# Altium PCB LED_EN_Kian_V2_t1.PcbDoc
Units mm, origin at the board's own origin, x right, y up, seen from the top; angles counter-clockwise.
Board outline 63.5 x 63.75 mm, 2 copper layers (Top Layer, Bottom Layer); 51 components, 23 nets, 119 pads, 0 vias.
Unrouted connection lines stored in the file: 5.
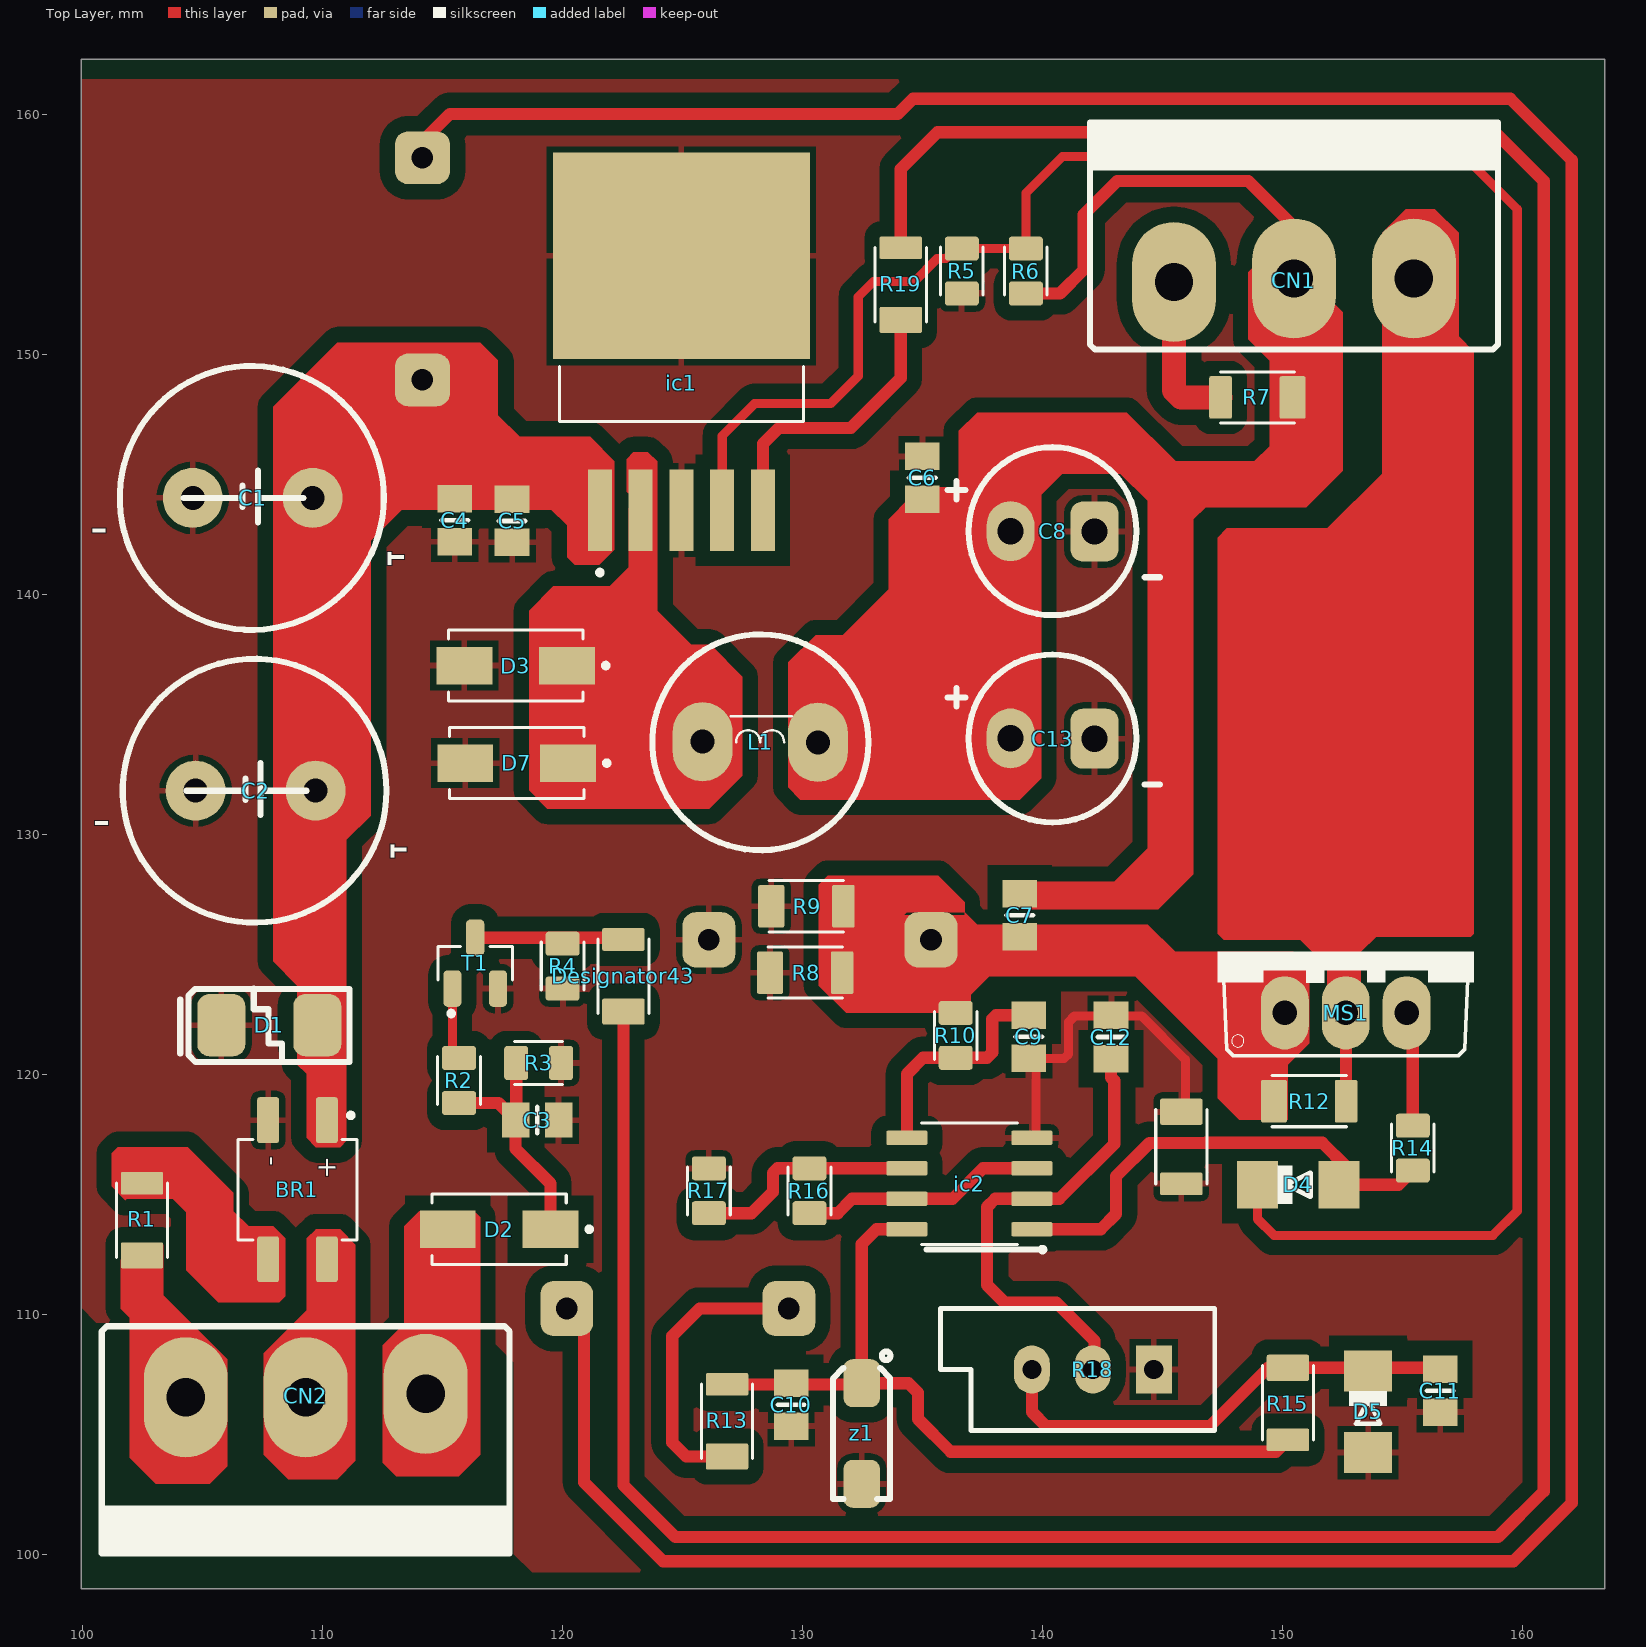
[diagram p0: Top Layer view]
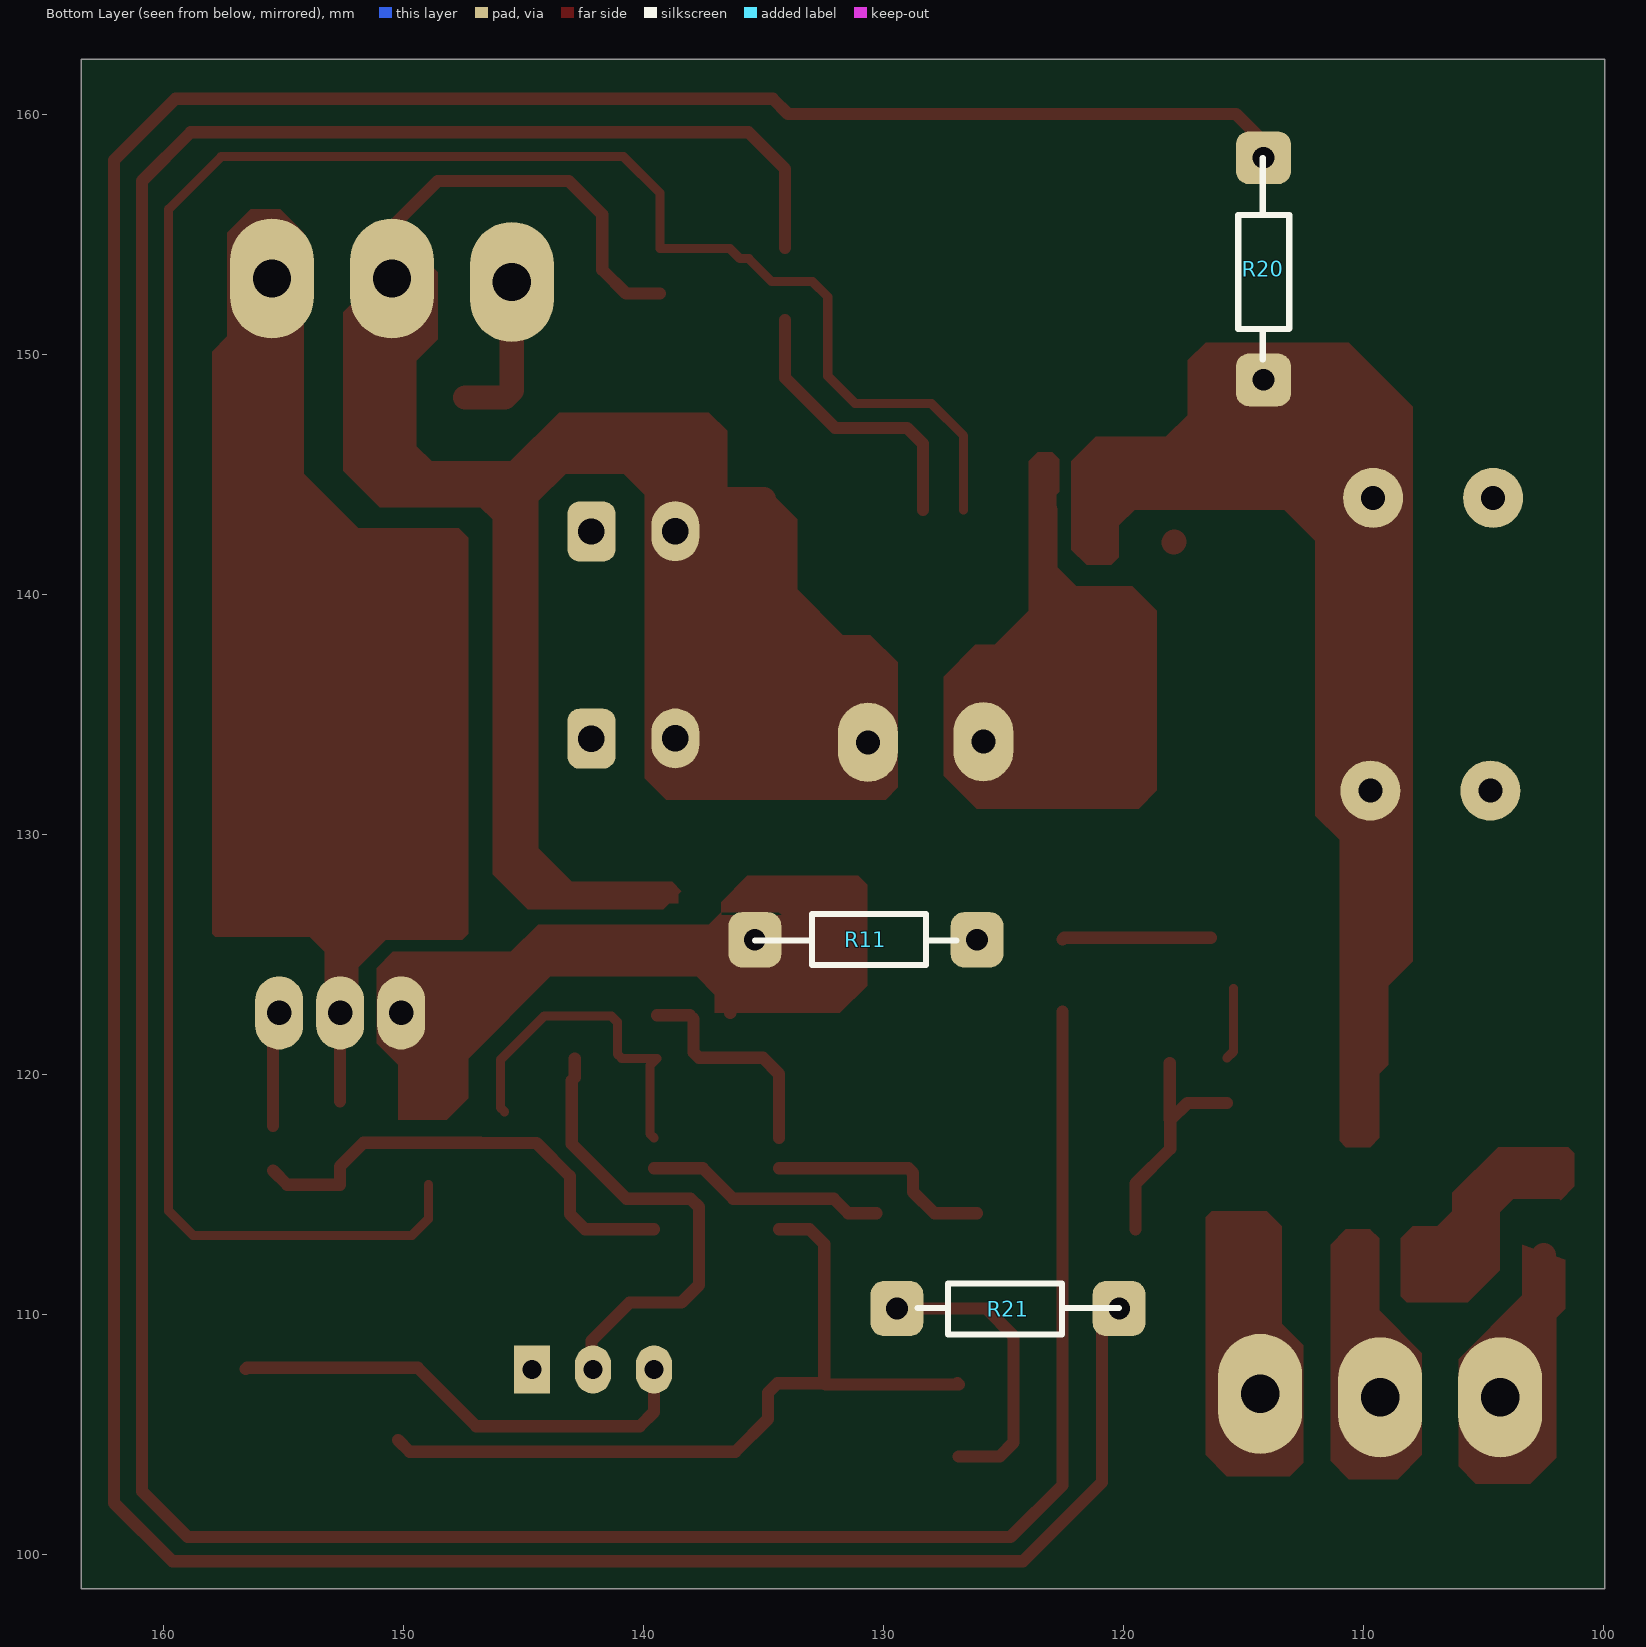
[diagram p1: Bottom Layer view, seen from below]
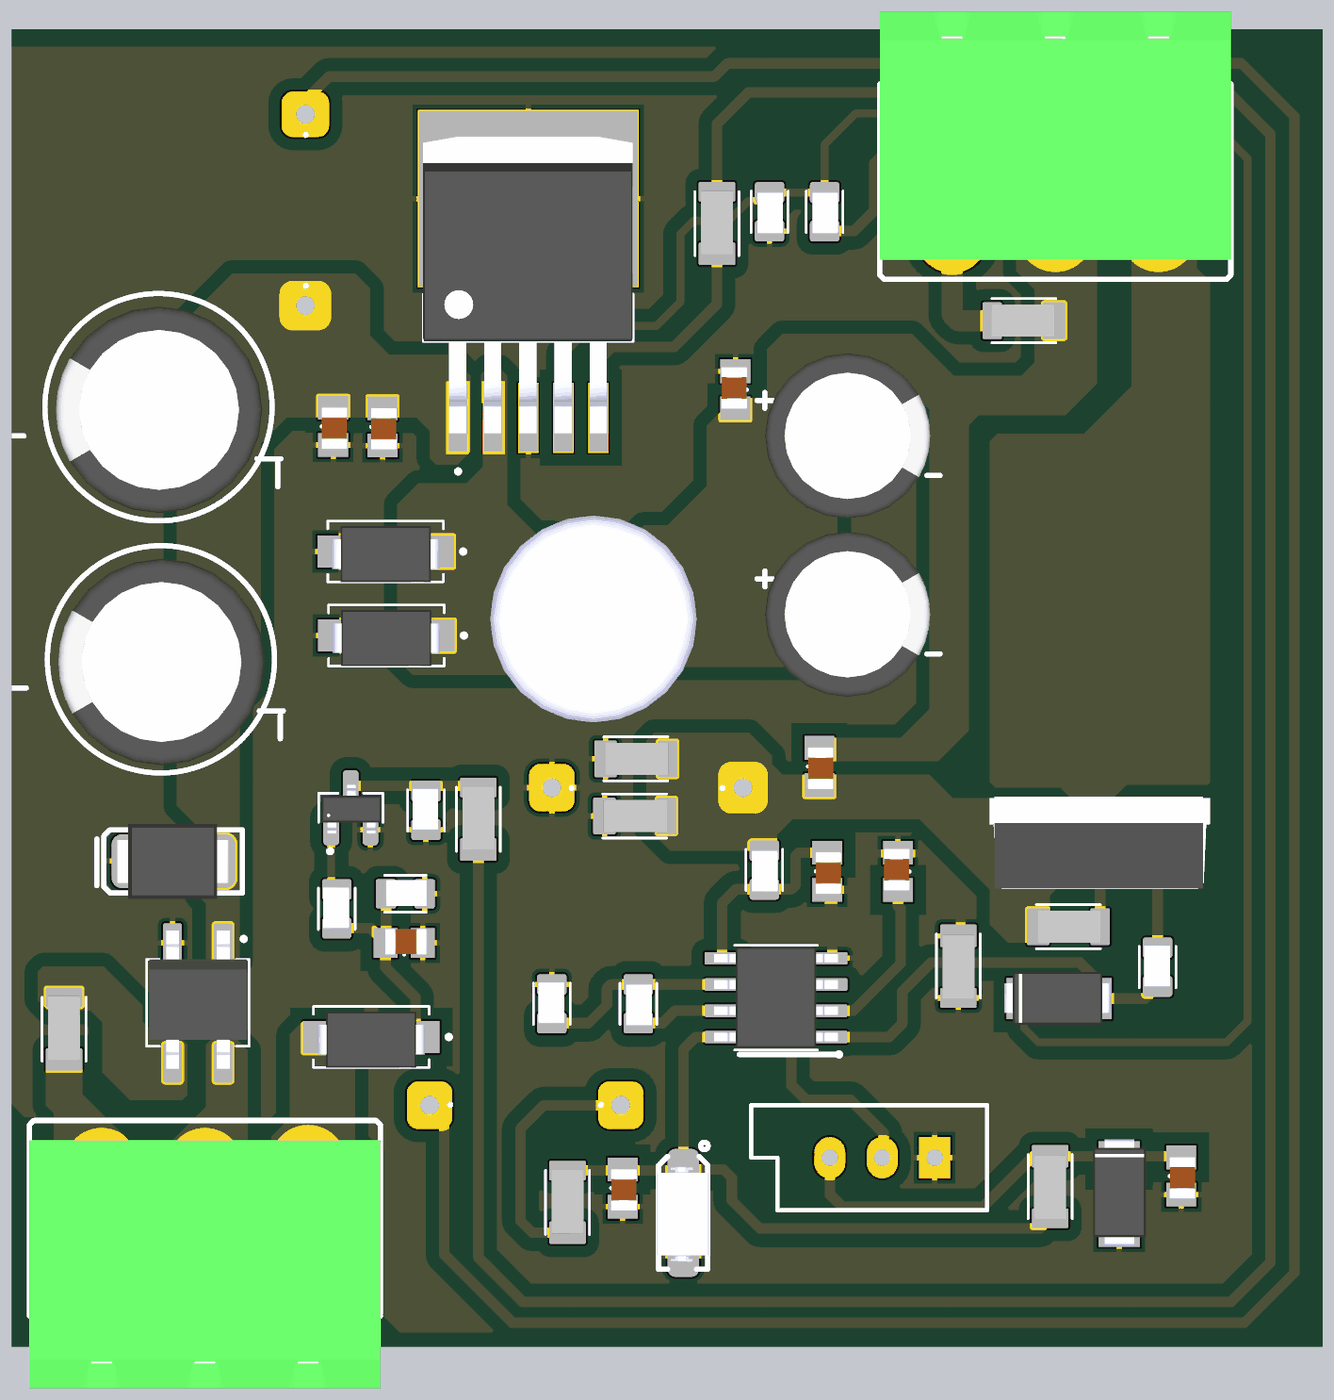
[diagram p2: 3D render of the assembled board from above, using the file's embedded part models]
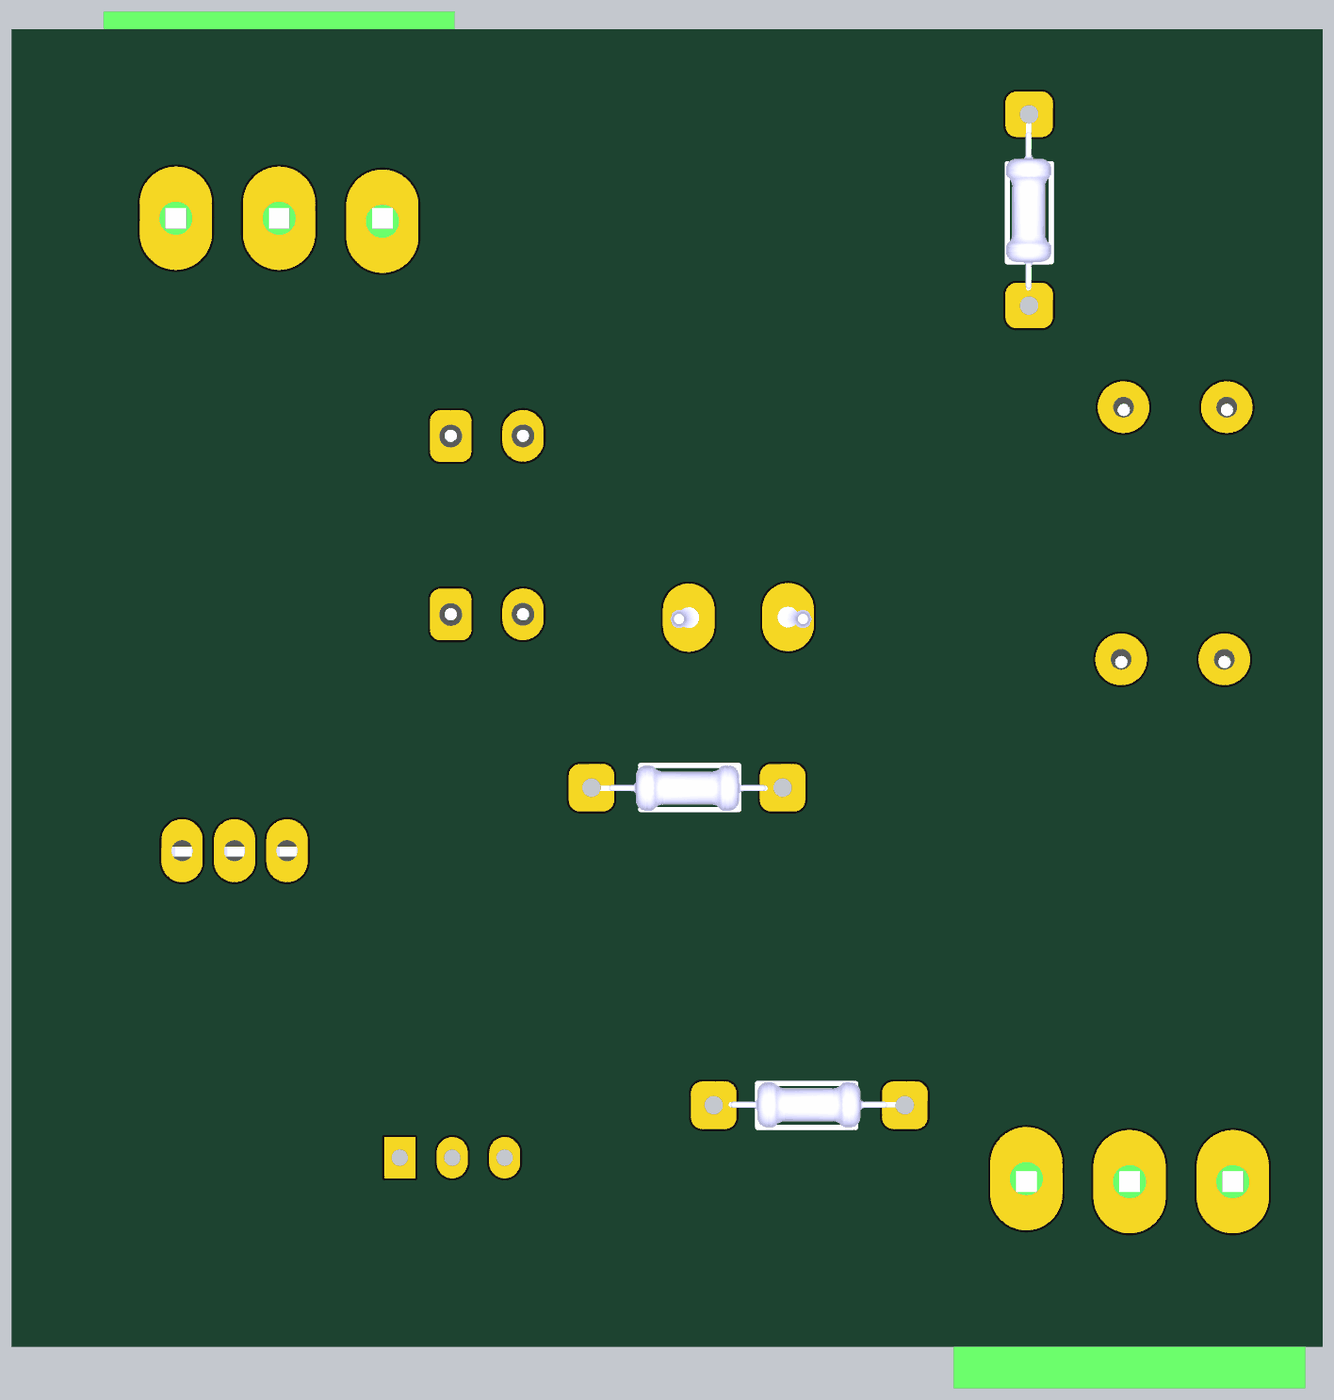
[diagram p3: 3D render of the assembled board from below, using the file's embedded part models]

## Layer stack, top to bottom
Top Solder: solder mask 0.0102, Solder Resist, Dk 3.5
Top Layer: signal copper 0.0356
Dielectric 1: dielectric 0.32, FR-4, Dk 4.8
Bottom Layer: signal copper 0.0356
Bottom Solder: solder mask 0.0102, Solder Resist, Dk 3.5

## Board outline
99.949,98.552 163.449,98.552 163.449,162.306 99.949,162.306

## Design rules (kind name [scope] priority, off if disabled: settings)
Clearance GND [InNet('GND')] p1: gap=0.635 ignorepadtopadclearanceinfootprint=FALSE
Clearance [All] p2: gap=0.127 ignorepadtopadclearanceinfootprint=FALSE
PolygonConnect [All] p1: connectstyle=Relief reliefconductorwidth=0.254 reliefentries=4 polygonreliefangle="90 Angle" airgapwidth=0.254
RoutingVias [All] p1: holewidth=0.711 width=1.27 viastyle="Through Hole" minholewidth=0.711 minwidth=1.27 maxholewidth=0.711 maxwidth=1.27
SolderMaskExpansion [All] p1: expansion=0.102
UnpouredPolygon UnpouredPolygon_1 [InNet('GND')] p1: allowunpoured=TRUE allowshelved=TRUE
UnpouredPolygon [InNet('GND')] p2: allowunpoured=TRUE allowshelved=TRUE
Width [All] p1: maxlimit=5 minlimit=0.254 preferedwidth=0.254 minimp=50.000000 maximp=50.000000 favimp=50.000000
29 further rules are at their usual default settings.

## Classes and differential pairs
component class U_LED_EN_Kian_V2_SWITCHING: BR1 C1 C2 C3 C4 C5 C6 C7 C8 C9 C10 C11 C12 D1 D2 D3 D4 D5 ic1 ic2 L1 MS1 R1 R2 R3 R4 R5 R6 R7 R8 R9 R10 R12 R14 R15 R16 R17 R18 T1 z1
component class U_LED_EN_Kian_V2_CONECTOR: CN1 CN2

## Components (designator, comment, footprint, x,y, rotation, side; value= is the part's Value field where it differs from the comment)
BR1 "mb6s" MB6S/SMD 108.331,115.189 r90 top
C1 "100uF-50V" CAP-EL_P5MM 109.611,144.028 r180 top
C2 "100uF-50V" CAP-EL_P5MM 109.728,131.826 r180 top
C3 "1UF" CAP-0805 119.881,118.067 r180 top
C4 "100nF" CAP-0805 115.498,142.163 r90 top
C5 "100nF" CAP-0805 117.889,142.138 r90 top
C6 "100nF" CAP-0805 135.023,145.788 r270 top
C7 "100nF" CAP-0805 139.043,125.705 r90 top
C8 "1000uF-10V" CAP-EL-P3.5MM 142.184,142.631 r180 top
C9 "1nF" CAP-0805 139.424,120.635 r90 top
C10 "100nF" CAP-0805 129.518,105.301 r90 top
C11 "100nF" CAP-0805 156.569,105.885 r90 top
C12 "100nF" CAP-0805 142.897,122.475 r270 top
C13 "1000uF-10V" CAP-EL-P3.5MM 142.184,133.995 r180 top (schematic designator C8)
CN1 "LED_OUT" CONECTOR/FONIX/3PIN 155.495,153.162 r180 top
CN2 "INPUT-24-S" CONECTOR/FONIX/3PIN 104.309,106.536 r0 top
D1 "40V" TVS-5V-SMD 109.791,122.047 r180 top
D2 "M7" DIOD/1N4007/SMD 119.526,113.538 r180 top
D3 "1N5822" DIOD/1N4007/SMD 120.219,137.033 r180 top
D4 "4148" mini_melf 150.821,115.443 r0 top
D5 "4148" mini_melf 153.633,105.791 r270 top
D7 "1N5822" DIOD/1N4007/SMD 120.257,132.969 r180 top (schematic designator D3)
Designator43 "Comment" RES/1206 122.682,124.079 r90 top
ic1 "lm2576" lm2576 126.111,149.792 r90 top
ic2 "LM358" SOP-8 136.587,115.57 r180 top
L1 "100uH" inductor-9*12 125.857,133.858 r0 top
MS1 "IRF540" TO-220 152.655,122.556 r0 top
R1 "1.1R" RES/1206 102.616,113.919 r90 top
R2 "4.7K" RES/0805 114.764,120.788 r270 top
R3 "100K" RES/0805 120.064,121.403 r180 top
R4 "10K" RES/0805 119.082,125.554 r270 top
R5 "10K" RES/0805 137.585,152.426 r90 top
R6 "10K" RES/0805 140.254,152.426 r90 top
R7 "18R" RES/1206 148.971,148.336 r180 top
R8 "0.2R" RES/1206 130.128,124.103 r0 top
R9 "0.2R" RES/1206 130.182,126.869 r0 top
R10 "1k" RES/0805 137.331,120.572 r90 top
R11 "Comment" RES/0.25W 126.111,125.603 r0 bottom
R12 "0R" RES/1206 151.13,118.745 r0 top
R13 "2.2k" RES/1206 127,105.537 r90 top
R14 "100R" RES/0805 154.515,117.969 r270 top
R15 "2.2k" RES/1206 150.114,106.297 r270 top
R16 "10K" RES/0805 131.235,114.095 r90 top
R17 "2.2k" RES/0805 125.178,116.191 r270 top
R18 "TURN POT" VR5 142.113,107.696 r180 top value=10K
R19 "2.2k" RES/1206 134.239,152.908 r90 top (schematic designator R15)
R20 "Comment" RES/0.25W 114.173,148.936 r90 bottom
R21 "Comment" RES/0.25W 129.448,110.236 r180 bottom
T1 "NPN" SOT23 115.422,123.565 r90 top
z1 "12v" DIOD/RS1J 132.588,104.945 r270 top
? "Comment" RES/1206 145.669,116.967 r270 top

## Footprints (in the part's own frame and the unit in brackets; to place one, negate y for a bottom-side part, rotate by r counter-clockwise, add the part's x,y. Pads: shape width x height; smd on the part's side, far side on the other; paste and mask are expansions set on the pad)
CAP-0805 [mm]
  rect 1.15x1.45 smd: 1(0.025,-0.022) 2(1.825,-0.022)
  silkscreen extent 0.93,-0.57 0.93,0.53, body extent -0.17,-0.71 1.84,0.54, height 0.94
CAP-EL-P3.5MM [mm]
  oval 2x2.5 hole 1.1: +(3.5,0)
  rrect50% 2x2.5 hole 1.1: -(0,0.01)
  silkscreen extent -2.73,-3.5 6.13,3.5, body extent -2.25,-4 5.75,4, height 11.5
CAP-EL_P5MM [mm]
  round 2.5 hole 1: +(0.01,0.01) -(5.01,0.01)
  silkscreen extent -2.95,-5.49 8.05,5.51, body extent -2.48,-4.86 7.52,5.14, height 16
CONECTOR/FONIX/3PIN [mm]
  oval 3.5x5 hole 1.6: 1(0,0) 2(5,0) 3(10,0.144)
  silkscreen extent -3.5,-6.5 13.5,2.96, body extent -3.5,-10 13.5,2, height 8.8
DIOD/1N4007/SMD [mm]
  rect 2.33x1.56 smd: A(4.299,0) K(0.019,0)
  silkscreen extent -1.7,-1.48 4.96,1.48, body extent -0.44,-1.24 4.76,1.49, height 2.6
DIOD/RS1J [mm]
  rrect50% 2x1.524 smd: A(2.013,-0.106) K(-2.178,-0.106)
  silkscreen extent -3.5,-1.31 2.65,1.09, body extent -2.32,-1.44 2.28,1.16, height 2.1
inductor-9*12 [mm]
  oval 2.5x3.3 hole 1: 1(-0.01,0) 2(4.8,-0.025)
  silkscreen extent -2.1,-4.52 6.9,4.47, body extent -2.73,-5.09 7.27,4.91, height 12
lm2576 [mm]
  rect 3.4x1 smd paste-3 mask+0: 1(-6.282,4.543) 2(-6.282,2.843) 3(-6.282,1.143) 4(-6.282,-0.557) 5(-6.282,-2.257)
  rect 8.6x10.7 smd paste-6 mask+0: 6(4.318,1.143)
  silkscreen extent -8.98,-3.94 -0.3,6.22, body extent -7.04,-3.92 7.31,6.24, height 4.65
MB6S/SMD [mm]
  rrect23% 1.91x0.91 smd: +(2.9,-1.86) -(2.9,0.59) F(-2.9,0.59) N(-2.9,-1.86)
  silkscreen extent -2.1,-3.12 3.2,1.85, body extent -3.19,-3 3.51,1.72, height 2.9
mini_melf [mm]
  rect 1.7x2 smd: A(1.557,-0.049) K(-1.843,-0.049)
  silkscreen extent -1.01,-0.84 0.36,0.74, body extent -2.79,-1.31 2.35,1.25, height 2.5
RES/0.25W [mm]
  rrect50% 2.2x2.3 hole 0.9: 1(0,0) 2(9.258,0)
  silkscreen extent 0.85,-1.07 9.26,1.05, body extent 0.81,-1.08 8.41,1.12, height 2.1
RES/0805 [mm]
  rrect25% 1x1.42 smd: 1(0.113,0.933) 2(1.983,0.933)
  silkscreen extent 0.05,0.04 2.05,1.82, body extent 0,0.28 2,1.53, height 0.6
RES/1206 [mm]
  rrect14% 1.09x1.77 smd: 1(-1.469,0.131)
  rrect14% 0.94x1.77 smd: 2(1.536,0.131)
  silkscreen extent -1.55,-0.93 1.55,1.2, body extent -1.51,-0.64 1.59,0.91, height 0.55
SOP-8 [mm]
  rrect25% 1.71x0.61 smd: 1(-2.986,2.032) 2(-2.986,0.762) 3(-2.986,-0.508) 4(-2.986,-1.778) 5(2.224,-1.778) 6(2.224,-0.508) 7(2.224,0.762) 8(2.224,2.032)
  silkscreen extent -3.53,-2.4 1.62,2.98, body extent -3.38,-2.32 2.62,2.58, height 1.75
SOT23 [mil]
  rrect50% 60x30 smd: 1(0.24,0) 2(0.24,-74.8) 3(83.7,-37.4)
  silkscreen extent -45,-99 70,24, body extent -7,-96 86,19, height 44
TO-220 [mil]
  oval 78.74x120 hole 40: 1(-100.04,-0.04) 2(-0.04,-0.04) 3(99.96,-0.04)
  silkscreen extent -210,-70 210,100, body extent -201,-72 196,103, height 781
TVS-5V-SMD [mm]
  rrect50% 2x2.6 smd: 1(4,0) 2(0,0)
  silkscreen extent -1.33,-1.53 5.72,1.54, body extent -0.66,-1.79 4.74,1.83, height 2.43
VR5 [mm] "Thru-Hole; 3 Leads"
  rect 1.5x2 hole 0.8: 1(-2.54,0)
  oval 1.5x2 hole 0.8: 2(0,0) 3(2.54,0)
  silkscreen extent -5.08,-2.54 6.35,2.54

## Part data
BR1: library part "BRIDGE RECTIFIERS/SMD"
C1 C2 C8 C13: library part cap-electrolit
C3 C4 C5 C6 C7 C9 C10 C11 C12: library part cap_smd
CN1 CN2: library part CONECTOR/FONIX/3PIN
D1: library part TVS-SMD
D2 D3 D4 D5 D7: library part DIOD/RECTIFIERS
L1: library part inductor
MS1: library part MOSFET_N_CH
R1 R2 R3 R4 R5 R6 R7 R8 R9 R10 R12 R13 R14 R15 R16 R17 R19: library part RES/SMD
R18: library part RPot, "Potentiometer", LatestRevisionDate=17-Jul-2002, LatestRevisionNote="Re-released for DXP Platform.", PackageDescription="Variable Resistor, Thru-Hole; 3 Leads", PackageReference=VR5, Published=8-Jun-2000, Publisher="Altium Limited", Set Position=0.5, Sim Note="Enter the Resistance value and the set point into parameter fields."
z1: library part zener-0.5w

## Nets (pads, with @x,y where several pads share a name; then routed paths per layer and width w, separated by ;. In a path a pad name is that pad's centre, name@x,y a point inside that pad or via, vN(x,y) a via of type N, cw(c..) or ccw(c..) an arc to the next point about the centre after c; other vN are vias at no path point)
+12: C10.2 ic2.8 R13.2 R15.2 z1.K | length 33.4
  Top Layer w0.508: R13.2@126.919,107.123 R13.2 132.433,107.073 z1.K ; ic2.8 133.096,113.538 132.482,112.924 z1.K ; R15.2 149.751,104.267 136.187,104.267 134.826,105.628 134.826,106.728 134.431,107.123 z1.K
+24: BR1.+ C1.+ C2.+ C4.2 C5.2 D1.2 ic1.1 R13.1 R20.1 R20.2 R21.1 R21.2 | length 213.1
  Top Layer w0.508: R20.1 114.173,144.272 114.427,144.018 ; R20.2 114.173,158.877 115.316,160.02 133.985,160.02 134.62,160.655 159.512,160.655 162.075,158.092 162.075,132.08 162.075,102.133 159.645,99.703 124.198,99.703 120.904,102.997 120.904,109.522 R21.2 ; R13.1 125.167,104.068 124.587,104.648 124.587,109.093 125.73,110.236 R21.1
  Top Layer w1.016: BR1.+ 110.191,143.428 C1.+ 114.427,144.018 121.06,144.018 ic1.1
+LED_G: CN1.3 R7.2 | length 6.6
  Top Layer w1.016: CN1.3 145.495,148.51 145.8,148.205 R7.2
+LED_OUT: C6.2 C7.2 C8.+ C13.+ CN1.2 L1.2 R6.1 R7.1 | length 84.1
  Top Layer w0.508: C7.2 144.167,127.53 145.034,128.397 145.034,144.653 144.907,144.78 ; R6.1 140.745,152.539 141.732,153.526 141.732,155.829 143.129,157.226 148.59,157.226 150.495,155.321 CN1.2
  Top Layer w1.016: L1.2 138.024,133.833 138.684,134.493 C8.+ 138.684,143.891 ; C6.2 138.612,143.963 138.684,143.891 ; CN1.2 150.495,145.542 149.733,144.78 144.907,144.78 143.129,146.558 139.827,146.558 138.684,145.415 138.684,143.891
-LED_OUT: CN1.1 MS1.2 R12.2 | length 35.5
  Top Layer w0.508: MS1.2 152.666,122.543 R12.2
  Top Layer w1.016: MS1.2 152.654,132.461 155.495,135.302 CN1.1
AC1: CN2.1 R1.1 | length 6.7
  Top Layer w1.016: R1.1 102.485,108.359 CN2.1
AC2: BR1.N CN2.2 | length 6.7
  Top Layer w1.016: CN2.2@108.921,106.924 CN2.2 110.191,107.418 BR1.N
EN: Designator43.1 Designator43.2 ic1.5 R4.1 R19.1 R19.2 T1.3 | length 164.2
  Top Layer w0.508: T1.3 122.476,125.691 Designator43.2 ; Designator43.1 122.551,102.874 124.714,100.711 159.004,100.711 160.909,102.616 160.909,157.226 158.877,159.258 135.636,159.258 134.108,157.73 R19.2 ; ic1.5 128.368,146.275 129.032,146.939 132.031,146.939 134.108,149.016 R19.1
GATE: MS1.3 R14.1 | length 4.8
  Top Layer w0.508: MS1.3 155.448,122.301 R14.1
GND: ?.1 ?.2 BR1.- C1.- C2.- C3.1 C4.1 C5.1 C6.1 C8.- C9.1 C10.1 C11.1 C12.1 C13.- D1.1 D3.A D5.A D7.A ic1.3 ic1.6 ic2.4 R3.1 R4.2 R5.1 R8.1 R9.1 R11.1 R17.1 R18.1 T1.2 z1.A | length 14.6
  Top Layer w0.381: ic2.4 139.745,117.52 139.745,120.361 C9.1 140.916,120.66 141.097,120.84 141.097,122.174 141.351,122.428 144.145,122.428 145.972,120.601 145.972,118.608 ?.1
  Top Layer w1.016: C5.1@117.886,142.188 C5.1
I_fb: C9.2 ic2.5 R10.1 | length 9.6
  Top Layer w0.508: ic2.5 134.363,120.012 135.036,120.685 R10.1 137.703,120.685 137.922,120.904 137.922,122.301 138.081,122.46 C9.2
Ic_fb: D4.K ic1.4 R5.2 R6.2 | length 99.9
  Top Layer w0.381: ic1.4 126.668,146.607 128.016,147.955 131.191,147.955 132.334,149.098 132.334,152.4 132.969,153.035 134.664,153.035 135.621,153.992 135.991,153.992 136.409,154.409 R5.2 R6.2 139.321,156.72 140.843,158.242 157.607,158.242 159.802,156.047 159.802,114.3 158.786,113.284 149.661,113.284 148.978,113.968 D4.K
NetBR1_F: BR1.F R1.2 | length 7.8
  Top Layer w1.016: R1.2 104.325,115.455 105.029,114.751 105.029,112.67 105.41,112.289 BR1.F
NetC3_2: C3.2 D2.K R2.2 R3.2 | length 10.2
  Top Layer w0.508: R2.2 117.34,118.805 C3.2 ; R3.2 118.081,118.114 C3.2 ; D2.K 119.507,115.443 118.056,116.894 C3.2
NetC7_1: C7.1 MS1.1 R8.2 R9.2 R10.2 R11.2 R12.1 | length 26.7
  Top Layer w0.508: R10.2 136.398,125.476 136.525,125.603 ; R12.1 149.661,122.102 MS1.1
  Top Layer w1.016: 131.664,125.615 131.676,125.603 134.826,125.603 136.525,125.603 143.891,125.603 146.939,122.555 MS1.1
NetC11_2: C11.2 D5.K R15.1 R18.3 | length 20.4
  Top Layer w0.508: R18.3@139.573,108.007 R18.3 139.573,105.918 140.165,105.326 146.982,105.326 149.421,107.765 R15.1 156.536,107.765 C11.2
NetC12_2: C12.2 ic2.2 R18.2 | length 20.3
  Top Layer w0.508: R18.2@142.184,107.315 142.184,108.895 140.589,110.49 138.43,110.49 137.703,111.217 137.703,114.462 138.049,114.808 ic2.2 140.716,114.808 143.002,117.094 143.002,119.739 142.875,119.866 C12.2
NetD3_K: D3.K D7.K ic1.2 L1.1 | length 17.2
  Top Layer w1.016: ic1.2 123.268,140.921 120.238,137.891 D7.K 124.196,132.969 L1.1@125.212,133.985
NetD4_A: D4.A ic2.1 R14.2 | length 19.7
  Top Layer w0.508: ic2.1 142.445,113.538 143.08,114.173 143.08,115.747 144.47,117.137 146.8,117.137 146.812,117.148 151.676,117.148 152.666,116.158 152.666,115.394 154.856,115.394 R14.2
Netic2_3: ic2.3 ic2.7 R16.1 | length 10
  Top Layer w0.508: R16.1 131.48,114.208 132.08,114.808 ic2.7 136.271,114.808 137.541,116.078 ic2.3
Netic2_6: ic2.6 R16.2 R17.2 | length 9.5
  Top Layer w0.508: R17.2 127.889,114.208 128.778,115.097 128.778,115.887 128.969,116.078 R16.2 ic2.6
NetR2_1: R2.1 T1.1 | length 3
  Top Layer w0.381: T1.1 115.422,120.95 R2.1
SIGNAL: CN2.3 D2.A | length 7.2
  Top Layer w0.381: CN2.3 115.227,107.598 D2.A

## Polygon pours and split planes (outlines as drawn)
GND on Top Layer (solid, remove dead copper, pour order 0): 99.949,110.284 100.584,109.649 116.332,109.649 117.983,107.998 117.983,99.997 118.745,99.235 163.576,99.235 163.576,100.969 163.449,101.096 163.449,161.465 99.949,161.465

## Other copper
Top Layer:
  rectangle net -LED_OUT: 147.32,125.857 157.988,142.24
  region net -LED_OUT: 151.892,122.46 151.892,124.46 150.749,125.603 147.574,125.603 147.32,125.857 147.32,142.367 147.701,142.748 151.892,142.748 154.178,145.034 154.178,155.067 155.158,156.047 156.373,156.047 157.353,155.067 157.353,150.749 157.988,150.114 157.988,125.857 157.861,125.73 153.924,125.73 153.289,125.095 153.289,122.682
  region net NetC7_1: 134.239,126.619 134.366,126.746 136.779,126.746 137.287,126.238 144.399,126.238 145.542,125.095 150.46,125.095 151.13,124.425 151.13,121.285 150.241,120.396 150.241,118.11 148.209,118.11 147.32,118.999 147.32,120.65 143.891,124.079 137.795,124.079 137.033,123.317 137.033,122.555 131.826,122.555 130.683,123.698 130.683,127.889 131.064,128.27 135.679,128.27 136.779,127.17 136.779,126.619
  region net +LED_OUT: 151.257,155.448 149.86,154.051 149.225,154.051 148.59,153.416 148.59,150.622 149.479,149.733 149.479,146.177 148.844,145.542 145.564,145.542 143.532,147.574 137.287,147.574 136.525,146.812 136.525,144.344 136.144,143.963 136.089,144.018 134.493,144.018 133.604,143.129 133.604,140.208 131.699,138.303 130.556,138.303 129.413,137.16 129.413,131.953 129.921,131.445 139.065,131.445 139.954,132.334 139.954,144.145 140.843,145.034 143.256,145.034 144.399,143.891 144.399,129.413 143.002,128.016 138.811,128.016 138.43,127.635 138.557,127.508 138.557,127.127 138.938,127.127 139.192,126.873 144.838,126.873 146.304,128.339 146.304,143.129 146.812,143.637 151.003,143.637 152.527,145.161 152.527,151.765 151.765,152.527
  region net NetD3_K: 122.809,144.145 122.682,144.272 122.682,145.636 122.969,145.923 123.571,145.923 123.952,145.542 123.952,139.309 125.37,137.891 126.191,137.891 127.508,136.574 127.508,132.441 126.131,131.064 119.38,131.064 118.618,131.826 118.618,139.319 119.634,140.335 122.301,140.335 122.809,140.843
  region net +24: 109.728,116.967 110.744,116.967 110.998,117.221 110.998,129.763 112.014,130.779 112.014,142.24 113.347,143.573 119.507,143.573 120.2,142.88 120.2,141.547 120.523,141.224 121.539,141.224 122.174,141.859 122.174,145.542 121.158,146.558 118.237,146.558 117.322,147.473 117.322,149.759 116.586,150.495 110.617,150.495 107.95,147.828 107.95,124.714 108.966,123.698 108.966,120.396 109.347,120.015 109.347,117.348
  region net GND: 124.587,145.034
  region net SIGNAL: 116.332,114.3 114.046,114.3 113.411,113.665 113.411,109.601 112.522,108.712 112.522,103.804 113.075,103.251 115.697,103.251 116.586,104.14 116.586,114.046
  region net AC2: 109.718,113.538 109.718,113.528 109.347,113.157 109.347,110.157 107.569,108.379 107.569,104.14 108.585,103.124 110.617,103.124 111.379,103.886 111.379,112.903 110.744,113.538 110.363,113.538
  region net NetBR1_F: 101.219,115.322 101.79,114.751 101.848,114.808 103.759,114.808 104.325,114.242 104.325,111.829 105.664,110.49 108.204,110.49 108.458,110.744 108.458,113.157 107.95,113.665 106.934,113.665 106.299,114.3 106.299,115.062 104.394,116.967 101.473,116.967 101.219,116.713
  region net AC1: 103.378,112.903 103.378,110.792 106.045,108.125 106.045,103.661 105.317,102.932 103.058,102.932 101.981,104.009 101.981,109.855 101.6,110.236 101.6,112.268

## Silkscreen, mask and mechanical layers (free items; w line width, h text height)
Mechanical 1:
  the board outline again, w0.254

## Text inside footprints (layer, text, board x,y; h text height)
BR1: Top Overlay "+" at 109.856,116.588 h0.81 r270; Top Overlay "-" at 107.566,116.589 h0.81 r270
C1: Top Overlay "-" at 112.248,141.864 h1.52 r270; Top Overlay "-" at 113.517,142.116 h1.52 r180; Top Overlay "-" at 101.071,143.223 h1.52 r180
C2: Top Overlay "-" at 112.365,129.662 h1.52 r270; Top Overlay "-" at 113.634,129.914 h1.52 r180; Top Overlay "-" at 101.188,131.021 h1.52 r180